# Altium PCB PCB.PcbDoc
Units mil, origin at the board's own origin, x right, y up, seen from the top; angles counter-clockwise.
Board outline 6000 x 4000 mil, 2 copper layers (Top Layer, Bottom Layer); 21 components, 129 nets, 256 pads, 10 vias.
Unrouted connection lines stored in the file: 14.
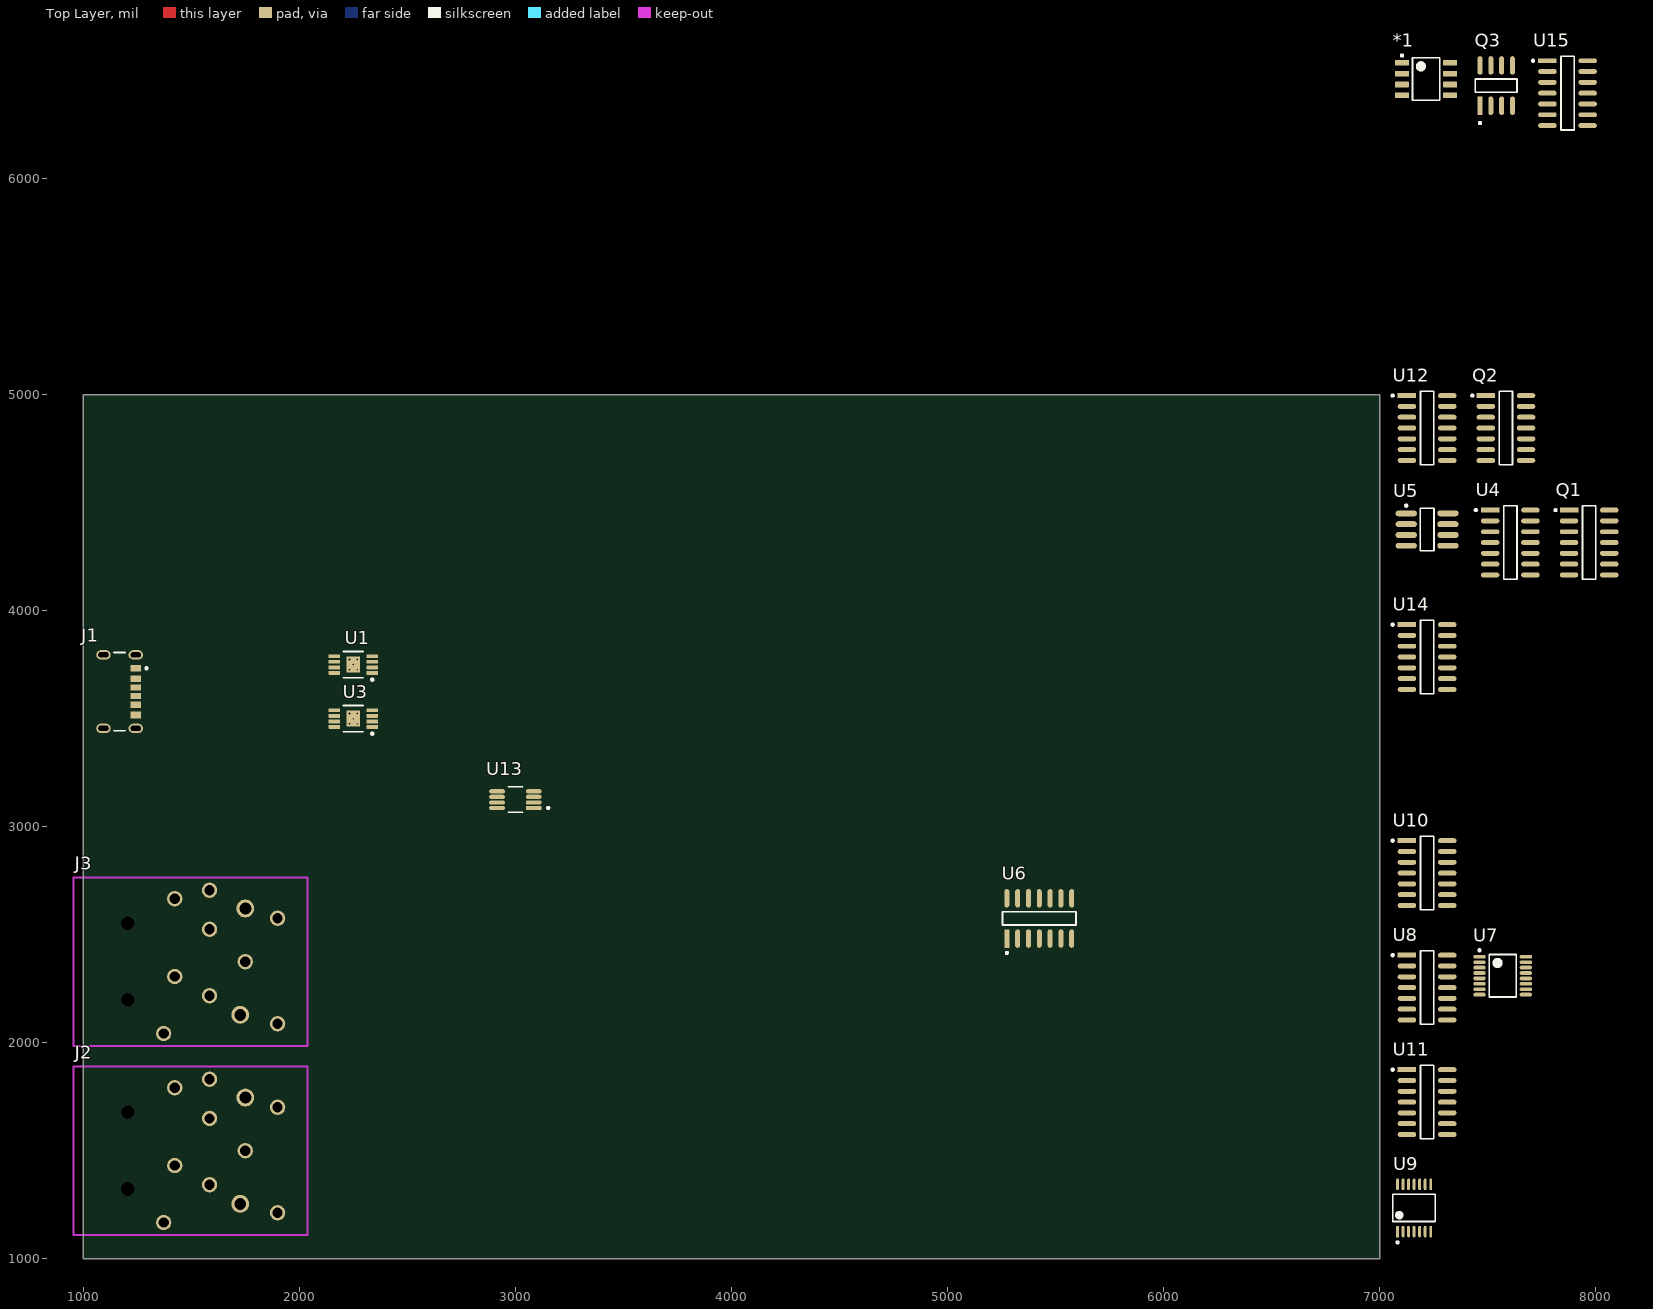
[diagram p0: Top Layer view]
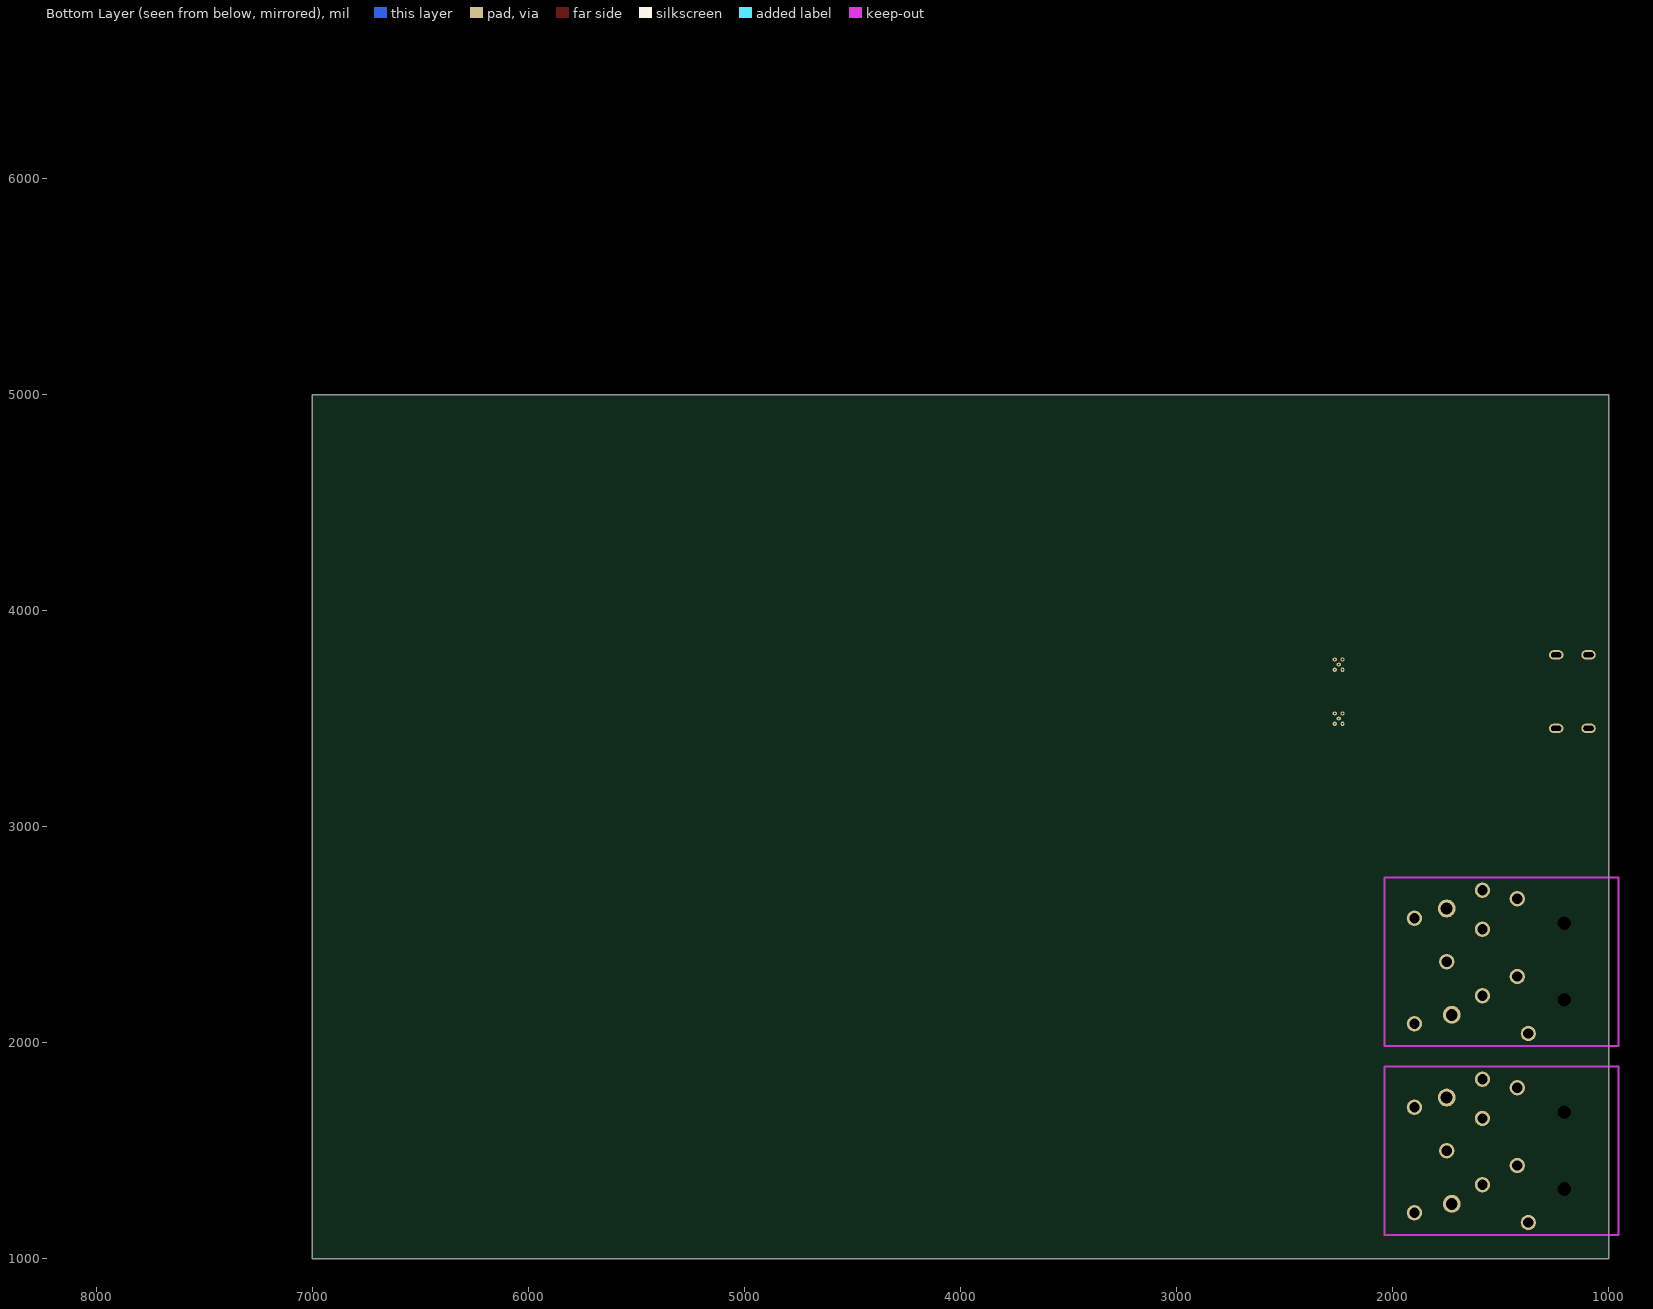
[diagram p1: Bottom Layer view, seen from below]

## Layer stack, top to bottom
Top Solder: solder mask 0.4, Solder Resist, Dk 3.5
Top Layer: signal copper 1.4
Dielectric 1: dielectric 12.6, FR-4, Dk 4.8
Bottom Layer: signal copper 1.4
Bottom Solder: solder mask 0.4, Solder Resist, Dk 3.5

## Board outline
1000,1000 7000,1000 7000,5000 1000,5000

## Design rules (kind name [scope] priority, off if disabled: settings)
Clearance [All] p1: gap=10 ignorepadtopadclearanceinfootprint=FALSE
PolygonConnect [All] p1: connectstyle=Relief reliefconductorwidth=10 reliefentries=4 polygonreliefangle="90 Angle" airgapwidth=10
RoutingVias [All] p1: holewidth=28 width=50 viastyle="Through Hole" minholewidth=28 minwidth=50 maxholewidth=28 maxwidth=50
SolderMaskExpansion [All] p1: expansion=4 istentingtop=FALSE
Width [All] p1: maxlimit=10 minlimit=10 preferedwidth=10
30 further rules are at their usual default settings.

## Classes and differential pairs
component class "tanh function cell": *1 C45 C46 C47 C48 M1 Q3 R84 R85 R86 R87 R88 R89 R90 R91 R92 R93 R94 U15
component class "Precision Full-Bridge Rectifier": D3 D4 R15 R16 R17 R18 R19 R20 R21 R22 R23 R24 R25 R26 R27 R28 U6
component class "Misc. Connections": C35 C36 C37 C38 C39 C40 C41 C42 C43 C44
component class "Log and Anti-Log Converters 2": C24 C25 C26 Q2 R72 R73 R74 R75 R76 R77 R78 R79 U12
component class "Log and Anti-Log Converters 1": C10 C11 C12 C13 Q1 R7 R8 R9 R10 R11 R12 R13 R14 U4 U5
component class "Level Detector": C30 C31 C32 C33 C34 D11 D12 D13 R80 R81 R82 R83 U14 X2 X3
component class "Knee Ratio": C27 C28 C29 U13
component class "Gain Control": C14 C15 R29 R30 R31 R32 R33 R34 R35 U7 U8 X1
component class "Comp Clipper": D9 D10 R57 R58 R59 R60 R61 R62 R63 R64 R65 R66 R67 R68 R69 R70 R71 U11
component class "Balanced Line Connectors": C16 C17 C18 C19 C20 C21 C22 C23 J2 J3 R36 R37 R38 R39 R40 R41 U9

## Components (designator, comment, footprint, x,y, rotation, side; value= is the part's Value field where it differs from the comment)
*1 "REF5050AIDR" D0008A_M 7215,6460 r0 top
J1 "USB-C" FP-USB4125-GF-A-0190-MFG 1125,3625 r270 top
J2 "ACJC10AHBULK" ACJC10AH 954.72,1500 r90 top
J3 "ACJC10AHBULK" ACJC10AH 954.72,2375 r90 top
Q1 "MAT14" FP-R-14-IPC_B 7970,4315 r0 top
Q2 "MAT14" FP-R-14-IPC_B 7585,4845 r0 top
Q3 "SSM2212RZ-R7" FP-R-8-IPC_B 7540,6430 r90 top
U1 "TPS7A4901DGNR" DGN0008D_M 2250,3750 r180 top
U3 "TPS7A3001DGNT" DGN0008D_M 2250,3500 r180 top
U4 "OPA4991IDR" FP-D0014A-IPC_B 7605,4315 r0 top
U5 "ADR01ARZ" ADI-R-8_M 7220,4375 r0 top
U6 "OPA4991" FP-D0014A-IPC_B 5425,2575 r90 top
U7 "THAT4305" QSOP-16 7570,2310 r0 top
U8 "OPA4991" FP-D0014A-IPC_B 7220,2255 r0 top
U9 "INA1650IPWR" FP-PW0014A-IPC_C 7160,1235 r90 top
U10 "OPA4991" FP-D0014A-IPC_B 7220,2785 r0 top
U11 "OPA4991" FP-D0014A-IPC_B 7220,1725 r0 top
U12 "OPA4991IDR" FP-D0014A-IPC_B 7220,4845 r0 top
U13 "OPA1637" FP-DGK0008A-IPC_A 3000,3125 r180 top
U14 "OPA4991" FP-D0014A-IPC_B 7220,3785 r0 top
U15 "OPA4991" FP-D0014A-IPC_B 7870,6395 r0 top

## Footprints (in the part's own frame and the unit in brackets; to place one, negate y for a bottom-side part, rotate by r counter-clockwise, add the part's x,y. Pads: shape width x height; smd on the part's side, far side on the other; paste and mask are expansions set on the pad)
ACJC10AH [mm] "XLR + 1/4 Combo Jack, Horizontal"
  round 2.1 hole 1.4: 1(-6.25,-19.6) 2(6.25,-20.2)
  round 1.8 hole 1.2: 3(0,-20.2) G(-8.45,-10.6) GN(-1.75,-11.9) R(-4,-16) RN(-7.3,-24) S(7.4,-11.9) SN(3.8,-16) T(8.4,-16) TN(5.1,-24)
  round 0 hole 1.6 unplated: MH2(-4.5,-6.4) MH2(4.5,-6.4)
  Keep-Out Layer lines w0.254: -9.9,0 -9.9,-27.5 9.9,-27.5 9.9,0 -9.9,0
ADI-R-8_M [mm] "SOIC, 8-Leads, Body 4.9x3.9mm, Pitch 1.27mm, IPC Low Density"
  oval 2.5x0.7 smd: 1(-2.45,1.905) 2(-2.45,0.635) 3(-2.45,-0.635) 4(-2.45,-1.905) 5(2.45,-1.905) 6(2.45,-0.635) 7(2.45,0.635) 8(2.45,1.905)
  silkscreen extent -2.57,-2.5 0.8,2.93, body extent -2,-2.5 2,2.5, height 1.75
D0008A_M [mm] "SOIC, 8-Leads, Body 5x4mm, Pitch 1.27mm, IPC Low Density"
  rrect15% 1.65x0.65 smd: 1(-2.825,1.905) 2(-2.825,0.635) 3(-2.825,-0.635) 4(-2.825,-1.905) 5(2.825,-1.905) 6(2.825,-0.635) 7(2.825,0.635) 8(2.825,1.905)
  silkscreen extent -2.95,-2.5 1.6,2.9, body extent -3,-2.45 3,2.45, height 1.63
DGN0008D_M [mm] "TSOP, 8-Leads, Body 3.1x3.1mm, Pitch 0.65mm, Thermal Pad 1.89x1.57mm, IPC Medium Density"
  rrect22% 1.35x0.45 smd: 1(-2.225,0.975) 2(-2.225,0.325) 3(-2.225,-0.325) 4(-2.225,-0.975) 5(2.225,-0.975) 6(2.225,-0.325) 7(2.225,0.325) 8(2.225,0.975)
  rrect6% 1.57x1.89 smd: 9(0,0)
  silkscreen extent -2.35,-1.55 1.15,1.9, body extent -2.45,-1.5 2.45,1.5, height 0.94
FP-D0014A-IPC_B [mil]
  rect 85.59x22.92 smd paste+0 mask+0: 1(-93.15,150)
  rrect100% 85.59x22.92 smd paste+0 mask+0: 2(-93.15,100) 3(-93.15,50) 4(-93.15,0) 5(-93.15,-50) 6(-93.15,-100) 7(-93.15,-150) 8(93.15,-150) 9(93.15,-100) 10(93.15,-50) 11(93.15,0) 12(93.15,50) 13(93.15,100) 14(93.15,150)
  silkscreen extent -164,-170 31,170, body extent -146,-180 146,180, height 10
FP-DGK0008A-IPC_A [mm]
  rect 1.857x0.498 smd paste+0 mask+0: 1(-2.151,0.975)
  rrect100% 1.857x0.498 smd paste+0 mask+0: 2(-2.151,0.325) 3(-2.151,-0.325) 4(-2.151,-0.975) 5(2.151,-0.975) 6(2.151,-0.325) 7(2.151,0.325) 8(2.151,0.975)
  silkscreen extent -3.98,-1.5 0.85,1.5, body extent -3.58,-2 3.58,2, height 0.25
FP-PW0014A-IPC_C [mm]
  rect 1.355x0.341 smd paste+0 mask+0: 1(-2.775,1.95)
  rrect100% 1.355x0.341 smd paste+0 mask+0: 2(-2.775,1.3) 3(-2.775,0.65) 4(-2.775,0) 5(-2.775,-0.65) 6(-2.775,-1.3) 7(-2.775,-1.95) 8(2.775,-1.95) 9(2.775,-1.3) 10(2.775,-0.65) 11(2.775,0) 12(2.775,0.65) 13(2.775,1.3) 14(2.775,1.95)
  silkscreen extent -4.17,-2.5 1.6,2.5, body extent -3.55,-2.6 3.55,2.6, height 0.25
FP-R-8-IPC_B [mil]
  rect 85.59x22.92 smd paste+0 mask+0: 1(-93.15,75)
  rrect100% 85.59x22.92 smd paste+0 mask+0: 2(-93.15,25) 3(-93.15,-25) 4(-93.15,-75) 5(93.15,-75) 6(93.15,-25) 7(93.15,25) 8(93.15,75)
  silkscreen extent -178,-96 31,96, body extent -146,-106 146,106, height 10
FP-R-14-IPC_B [mil]
  rect 85.59x22.92 smd paste+0 mask+0: 1(-93.15,150)
  rrect100% 85.59x22.92 smd paste+0 mask+0: 2(-93.15,100) 3(-93.15,50) 4(-93.15,0) 5(-93.15,-50) 6(-93.15,-100) 7(-93.15,-150) 8(93.15,-150) 9(93.15,-100) 10(93.15,-50) 11(93.15,0) 12(93.15,50) 13(93.15,100) 14(93.15,150)
  silkscreen extent -161,-170 31,170, body extent -146,-180 146,180, height 10
FP-USB4125-GF-A-0190-MFG [mm]
  rrect100% 1.1x1.7 hole 1.2 slot 0.6 at 0 deg paste-2539.97 mask+0: 1(-4.32,3) 2(4.32,3) 3(-4.32,-0.8) 4(4.32,-0.8)
  rect 0.7x1.2 smd paste+0 mask+0: A5(-0.5,3) B5(0.5,3)
  rect 0.76x1.2 smd paste+0 mask+0: A9(1.52,3) B9(-1.52,3)
  rect 0.8x1.2 smd paste+0 mask+0: A12(2.75,3) B12(-2.75,3)
  silkscreen extent -4.59,0.43 4.59,4.38, body extent -4.97,-3.57 4.97,3.95, height 0.25
QSOP-16 [mm] "QSOP, 16-Leads, Body 4.89x3.90mm, Pitch 0.64mm, IPC Medium Density"
  oval 1.45x0.45 smd: 1(-2.725,2.222) 2(-2.725,1.587) 3(-2.725,0.953) 4(-2.725,0.318) 5(-2.725,-0.318) 6(-2.725,-0.953) 7(-2.725,-1.587) 8(-2.725,-2.222) 9(2.725,-2.222) 10(2.725,-1.587) 11(2.725,-0.953) 12(2.725,-0.318) 13(2.725,0.318) 14(2.725,0.953) 15(2.725,1.587) 16(2.725,2.222)
  silkscreen extent -2.85,-2.5 1.6,3.12, body extent -3,-2.5 3,2.5, height 1.75

## Part data
*1: "Three Terminal Voltage Reference, 1 Output, 5V, Trim/Adjustable, PDSO8", Case/Package=SOP, Manufacturer="Texas Instruments", Max Operating Temperature=125°C, Max Output Voltage=5.005V, Max Supply Voltage=18V, Min Operating Temperature=-40°C, Min Output Voltage=4.995V, Min Supply Voltage=2.7V, Nominal Output Voltage=5V, Package Body Material=Plastic, Package Equivalence Code=SOP8,.25, Package Shape=Rectangular, Package Style="SMALL OUTLINEMeter", Peak Reflow Temperature (Cel)=260°C, Supplier Part Number=595-REF5050AIDR, Temp Coef of Voltage-Max=3ppm/°C, Temperature Grade=AUTOMOTIVE, Voltage Tolerance-Max=0.1%, Category="Voltage References", Channels=1, ComponentLink1Description=https://www.ti.com:443/lit/ds/symlink/ref5010.pdf?src-supplier=IHS+Markit, ComponentLink1URL=https://www.ti.com:443/lit/ds/symlink/ref5010.pdf?src-supplier=IHS+Markit, ComponentLink2Description=https://datasheet.ciiva.com/3236/ref5050-3236312.pdf?src-supplier=Avnet, ComponentLink2URL=https://datasheet.ciiva.com/3236/ref5050-3236312.pdf?src-supplier=Avnet, ComponentLink3Description=https://datasheet.ciiva.com/2012/ref5020-2012761.pdf?src-supplier=Digikey, ComponentLink3URL=https://datasheet.ciiva.com/2012/ref5020-2012761.pdf?src-supplier=Digikey, Height - Seated (Max)=1.75mm, JESD-30 Code=R-PDSO-G8, JESD-609 Code=e4, Length=4.9mm, Manufacturer Part Number=REF5050AIDR, Moisture Sensitivity Level=2, Number of Outputs=1, Pins=8, Pricing="1=3.52, 10=3.17, 50=3.17, 100=2.59, 250=2.46, 500=2.21, 1000=1.86, 2500=1.77, 5000=1.7, 10000=1.77 (USD)", Qualification Status="Not Qualified", Reach SVHC Compliant=Yes, RoHS=Yes, RoHS Compliant=Yes, Stock=15005, Supplier=Mouser, Surface Mount=Yes, Terminal Finish=Nickel, Terminal Form="Gull Wing", Terminal Pitch=1.27mm, Terminal Position=DUAL, Throw Configuration="THREE TERMINAL VOLTAGE REFERENCE", Trim/Adjustable Output=Yes, Width=3.9mm
J1: "Generic USB-C Connector, Female"
J2 J3: "Audio/RCA Connector, 10 Pole(s), Female, Solder Terminal, Latch, Receptacle", Manufacturer=Amphenol, Supplier Part Number=889-ACJC10AHBULK-ND, ComponentLink1Description=https://datasheet.ciiva.com:443/pdfs/VipMasterIC/IC/AMPH/AMPHS14349/AMPHS14349-1.pdf?src-supplier=IHS+Markit, ComponentLink1URL=https://datasheet.ciiva.com:443/pdfs/VipMasterIC/IC/AMPH/AMPHS14349/AMPHS14349-1.pdf?src-supplier=IHS+Markit, ComponentLink2Description=https://datasheet.ciiva.com/15309/88010807000-acjc10ah-241575-15309467.pdf?src-supplier=Mouser, ComponentLink2URL=https://datasheet.ciiva.com/15309/88010807000-acjc10ah-241575-15309467.pdf?src-supplier=Mouser, Connector Type="AUDIO/RCA CONNECTOR", Contact Finish - Mating="NOT SPECIFIED", Manufacturer Part Number=ACJC10AHBULK, Pricing="1=3.96, 10=3.6, 25=3.4092, 50=3.33, 100=3.1714, 250=2.77496, 500=2.69568, 1000=2.29926, 2500=2.1407 (USD)", RoHS=Yes, RoHS Compliant=Yes, Stock=1003, Supplier=Digikey
Q1 Q2: library part MAT14ARZ, "TRANS 4NPN 40V 0.03A 14SO", Case/Package=SOIC, Collector Base Voltage (VCBO)=40V, Collector Emitter Saturation Voltage=60mV, Frequency=300MHz, Max Collector Current=30mA, Max Frequency=1kHz, Max Operating Temperature=85°C, Min Operating Temperature=-40°C, Package Quantity=56, Collector Emitter Breakdown Voltage=40V, Collector Emitter Voltage (VCEO)=40V, Collector-emitter Voltage-Max=60mV, Height=1.5mm, Lead Free="Contains Lead", Length=8.75mm, Mount="Surface Mount", Number of Elements=4, Number of Pins=14, Packaging=Rail/Tube, Polarity=NPN, Radiation Hardening=No, REACH SVHC="No SVHC", RoHS Compliant=Yes, Series=MAT14, Transition Frequency=300MHz, Width=4mm
Q3: library part SSM2212, "TRANS 2NPN 40V 0.02A 8SOIC", Case/Package=SOIC, Collector Base Voltage (VCBO)=40V, Collector Emitter Breakdown Voltage=45V, Collector-emitter Voltage-Max=800mV, Frequency=200MHz, Max Collector Current=20mA, Max Operating Temperature=85°C, Max Power Dissipation=500mW, Min Operating Temperature=-40°C, Package Quantity=1000, Transition Frequency=450MHz, Collector Emitter Voltage (VCEO)=40V, Contact Plating=Tin, Element Configuration=Dual, Lead Free="Contains Lead", Max Breakdown Voltage=40V, Mount="Surface Mount", Number of Elements=2, Number of Pins=8, Packaging="Tape and Reel", Polarity=NPN, Radiation Hardening=No, RoHS Compliant=Yes, Series=SSM2212
U1: "Adjustable Positive LDO Regulator, 1.176V Min, 33V Max, 0.6V Dropout, BIPolar, PDSO8", Case/Package=HTSSOP, Dropout Voltage1-Max=600mV, Dropout Voltage1-Nom=333mV, Manufacturer="Texas Instruments", Operating Temperature, TJ-Max=125°C, Operating Temperature, TJ-Min=-40°C, Output Current1-Max=150mA, Output Voltage1-Max=33V, Output Voltage1-Min=1.194V, Package Body Material=Plastic, Package Equivalence Code=TSSOP8,.19, Package Shape=Square, Package Style="SMALL OUTLINE, HEAT SINK/SLUG, THIN PROFILE, SHRINK PITCHMeter", Peak Reflow Temperature (Cel)=260°C, Supplier Part Number=595-TPS7A4901DGNR, Adjustability=ADJUSTABLE, Category="Voltage Regulators - Linear", Channels=1, ComponentLink1Description=https://www.ti.com:443/lit/ds/symlink/tps7a49.pdf?src-supplier=IHS+Markit, ComponentLink1URL=https://www.ti.com:443/lit/ds/symlink/tps7a49.pdf?src-supplier=IHS+Markit, ComponentLink2Description=https://datasheet.ciiva.com/4885/sbvs121b-126024-4885345.pdf?src-supplier=Mouser, ComponentLink2URL=https://datasheet.ciiva.com/4885/sbvs121b-126024-4885345.pdf?src-supplier=Mouser, ComponentLink3Description=https://datasheet.ciiva.com/41462/001015155-da-01-en-ic-reg-ldo-adj-tps7a4901dgnr-vssop-8-tid-41462999.pdf?src-supplier=Conrad, ComponentLink3URL=https://datasheet.ciiva.com/41462/001015155-da-01-en-ic-reg-ldo-adj-tps7a4901dgnr-vssop-8-tid-41462999.pdf?src-supplier=Conrad, ComponentLink4Description=https://datasheet.ciiva.com/7547/1857485-7547109.pdf?src-supplier=Newark, ComponentLink4URL=https://datasheet.ciiva.com/7547/1857485-7547109.pdf?src-supplier=Newark, ComponentLink5Description=https://datasheet.ciiva.com/14275/sbvs121b-14275869.pdf?src-supplier=Avnet, ComponentLink5URL=https://datasheet.ciiva.com/14275/sbvs121b-14275869.pdf?src-supplier=Avnet, Height - Seated (Max)=1.1mm, JESD-30 Code=S-PDSO-G8, JESD-609 Code=e4, Length=3mm, Manufacturer Part Number=TPS7A4901DGNR, Moisture Sensitivity Level=2, Number of Outputs=1, Packaging="Tape and Reel", Pins=8, Pricing="1=2.84, 10=2.56, 50=2.56, 100=2.09, 1000=1.5, 10000=1.37 (USD)", Qualification Status="Not Qualified", Reach SVHC Compliant=Yes, Regulator Type="ADJUSTABLE POSITIVE SINGLE OUTPUT LDO REGULATOR", RoHS=Yes, RoHS Compliant=Yes, Stock=5747, Supplier=Mouser, Surface Mount=Yes, Technology=BIPOLAR, Terminal Finish=Nickel, Terminal Form="Gull Wing", Terminal Pitch=0.65mm, Terminal Position=DUAL, Width=3mm
U3: "Adjustable Negative LDO Regulator, 1.18V Min, 33V Max, 0.6V Dropout, BIPolar, PDSO8", Case/Package=HTSSOP, Dropout Voltage1-Max=600mV, Dropout Voltage1-Nom=325mV, Manufacturer="Texas Instruments", Operating Temperature, TJ-Max=125°C, Operating Temperature, TJ-Min=-40°C, Output Current1-Max=200mA, Output Voltage1-Max=33V, Output Voltage1-Min=1.18V, Package Body Material=Plastic, Package Equivalence Code=TSSOP8,.19, Package Shape=Square, Package Style="SMALL OUTLINE, HEAT SINK/SLUG, THIN PROFILE, SHRINK PITCHMeter", Peak Reflow Temperature (Cel)=260°C, Supplier Part Number=595-TPS7A3001DGNT, Adjustability=ADJUSTABLE, Category="Voltage Regulators - Linear", Channels=1, ComponentLink1Description=https://www.ti.com:443/lit/ds/symlink/tps7a30.pdf?src-supplier=IHS+Markit, ComponentLink1URL=https://www.ti.com:443/lit/ds/symlink/tps7a30.pdf?src-supplier=IHS+Markit, ComponentLink2Description=https://datasheet.ciiva.com/22733/1726442-22733400.pdf?src-supplier=Farnell, ComponentLink2URL=https://datasheet.ciiva.com/22733/1726442-22733400.pdf?src-supplier=Farnell, ComponentLink3Description=https://datasheet.ciiva.com/4885/sbvs125a-126025-4885255.pdf?src-supplier=Mouser, ComponentLink3URL=https://datasheet.ciiva.com/4885/sbvs125a-126025-4885255.pdf?src-supplier=Mouser, ComponentLink4Description=https://datasheet.ciiva.com/14276/tps7a3001-14276192.pdf?src-supplier=Avnet, ComponentLink4URL=https://datasheet.ciiva.com/14276/tps7a3001-14276192.pdf?src-supplier=Avnet, Height - Seated (Max)=1.1mm, JESD-30 Code=S-PDSO-G8, JESD-609 Code=e4, Length=3mm, Manufacturer Part Number=TPS7A3001DGNT, Moisture Sensitivity Level=2, Number of Outputs=1, Packaging="Tape and Reel", Pins=8, Pricing="1=4.76, 10=4.19, 50=4.19, 100=3.5, 250=3.32, 500=2.98, 1000=2.52, 2500=2.39, 10000=2.39 (USD)", Qualification Status="Not Qualified", Reach SVHC Compliant=Yes, Regulator Type="ADJUSTABLE NEGATIVE SINGLE OUTPUT LDO REGULATOR", RoHS=Yes, RoHS Compliant=Yes, Stock=15878, Supplier=Mouser, Surface Mount=Yes, Technology=BIPOLAR, Terminal Finish=Nickel, Terminal Form="Gull Wing", Terminal Pitch=0.65mm, Terminal Position=DUAL, Width=3mm
U4 U12: "40-V, DUAL 4.5MHZ, RAIL-TO-RAIL"
U5: library part CMP-0784-00317-1, "Ultracompact, Precision Voltage Reference, 10 V Output, 12 to 36 V Supply, Industrial, 8-pin SOIC (R-8), Tube", Manufacturer="Analog Devices", Operating Temp Range="-40 to 125 degC", Code_JEDEC=MS-012-AA, ComponentLink1Description="Manufacturer URL", ComponentLink1URL=http://www.analog.com/en/index.html, ComponentLink2Description=Datasheet, ComponentLink2URL=http://www.analog.com/static/imported-files/data_sheets/ADR01_02_03_06.pdf, ComponentLink3Description="Package Specification", ComponentLink3URL=http://www.analog.com/static/imported-files/packages/PKG_PDF/SOIC_Narrow%20(R)/R_8.pdf, ComponentLink4Description="URL Link1", ComponentLink4URL="Product URL:http://www.analog.com/en/special-linear-functions/voltage-references/adr01/products/product.html", DatasheetVersion="Rev. R", Max V Supply (V)=36, Min V Supply (V)=12, Mounting Technology="Surface Mount", PackageDescription="8-Pin Standard Small Outline Package, Body 4.9 x 3.9 mm, Pitch 1.27 mm", PackageReference=R-8, PackageVersion="060506-A, 06/2006", Packing=Tube, PartNumber=ADR01ARZ, Ref Out TC (ppm/C)=3, Vout=10V
U6 U8 U10 U11 U14 U15: library part OPA4991IDR, "40-V, DUAL 4.5MHZ, RAIL-TO-RAIL"
U7: library part 4305Q16-U, "Pre-trimmed Analog Engine® Dynamics Processor IC"
U9: "IC AUDIO RECEIVER 14TSSOP", Case/Package=TSSOP, Max Operating Temperature=125°C, Min Operating Temperature=-40°C, Logic Function=Receiver, Number of Channels=2, Number of Pins=14, Packaging="Tape and Reel", RoHS Compliant=Yes
U13: library part OPA1637DGKT, "Fully differential amplifier"

## Via types
v1: diameter 19.68, hole 7.87, Top Layer to Bottom Layer, 10 vias

## Nets (pads, with @x,y where several pads share a name; then routed paths per layer and width w, separated by ;. In a path a pad name is that pad's centre, name@x,y a point inside that pad or via, vN(x,y) a via of type N, cw(c..) or ccw(c..) an arc to the next point about the centre after c; other vN are vias at no path point)
5V: J1.1
+10V_Ref: 
+15V: U9.1 U13.3
-15V: U9.14 U13.6
Net*1_6: 
NetC1_1: 
NetC3_2: 
NetC5_2: 
NetC6_1: 
NetC7_1: 
NetC9_2: 
NetC10_1: 
NetC11_1: 
NetC11_2: 
NetC13_1: 
NetC18_1: U9.2
NetC18_2: J2.2 J2.T
NetC19_1: U9.4
NetC19_2: J2.3 J2.R
NetC20_1: U9.7
NetC20_2: J3.2 J3.T
NetC21_1: J3.3 J3.R U9.5
NetC24_1: 
NetC25_1: 
NetC25_2: 
NetC26_1: 
NetC28_2: U13.2
NetC30_2: 
NetC31_1: 
NetC31_2: 
NetC32_1: 
NetC32_2: 
NetC33_2: 
NetC45_1: 
NetC45_2: 
NetC46_2: 
NetD1_1: 
NetD2_2: 
NetD3_1: 
NetD3_2: 
NetD4_1: 
NetD5_1: 
NetD5_2: 
NetD6_1: 
NetD7_1: 
NetD7_2: 
NetD8_1: 
NetD9_1: 
NetD9_2: 
NetD10_1: 
NetD11_1: 
NetD11_2: 
NetD12_2: 
NetJ1_2: J1.2
NetJ1_3: J1.3
NetJ1_4: J1.4
NetM1_1: 
NetM1_2: 
NetM1_3: 
NetQ1_3: 
NetQ1_6: Q1.6
NetQ1_9: 
NetQ1_10: 
NetQ1_14: 
NetQ2_3: 
NetQ2_6: Q2.6
NetQ2_9: 
NetQ2_10: 
NetQ2_14: 
NetQ3_1: 
NetQ3_2: 
NetQ3_8: 
NetR8_2: 
NetR11_2: 
NetR13_2: 
NetR15_1: 
NetR15_2: 
NetR17_2: 
NetR20_1: 
NetR20_2: 
NetR21_2: 
NetR22_1: 
NetR22_2: 
NetR23_1: 
NetR23_2: 
NetR24_1: 
NetR25_1: 
NetR29_1: 
NetR29_2: 
NetR30_1: 
NetR30_2: 
NetR32_2: 
NetR33_2: 
NetR34_1: 
NetR38_1: U9.3
NetR39_1: U9.6
NetR42_2: 
NetR44_2: 
NetR48_2: 
NetR50_1: 
NetR50_2: 
NetR55_1: 
NetR57_1: 
NetR57_2: 
NetR64_1: 
NetR64_2: 
NetR65_2: 
NetR67_2: 
NetR68_1: 
NetR68_2: 
NetR69_1: 
NetR70_1: 
NetR76_2: 
NetR80_1: 
NetR82_2: 
NetR83_2: 
NetR89_2: 
NetR90_2: 
NetR92_1: 
NetT1_1: 
NetT1_3: 
NetU7_5: 
NetU9_8: U9.8
NetU9_13: U9.13
NetU13_1: U13.1
NetU14_8: 
NetU14_12: 
PGND: 
SGND: J2.1 J2.G J2.S J3.1 J3.G J3.S U9.9 U9.12
pads on no net: *1.1 *1.2 *1.3 *1.4 *1.5 *1.6 *1.7 *1.8 J1.A5 J1.A9 J1.A12 J1.B5 J1.B9 J1.B12 J2.GN J2.MH2 J2.RN J2.SN J2.TN J3.GN J3.MH2 J3.RN J3.SN J3.TN Q1.1 Q1.2 Q1.3 Q1.4 Q1.5 Q1.7 Q1.8 Q1.9 Q1.10 Q1.11 Q1.12 Q1.13 Q1.14 Q2.1 Q2.2 Q2.3 Q2.4 Q2.5 Q2.7 Q2.8 Q2.9 Q2.10 Q2.11 Q2.12 Q2.13 Q2.14 Q3.1 Q3.2 Q3.3 Q3.4 Q3.5 Q3.6 Q3.7 Q3.8 U1.1 U1.2 U1.3 U1.4 U1.5 U1.6 U1.7 U1.8 U1.9 U3.1 U3.2 U3.3 U3.4 U3.5 U3.6 U3.7 U3.8 U3.9 U4.1 U4.2 U4.3 U4.4 U4.5 U4.6 U4.7 U4.8 U4.9 U4.10 U4.11 U4.12 U4.13 U4.14 U5.1 U5.2 U5.3 U5.4 U5.5 U5.6 U5.7 U5.8 U6.1 U6.2 U6.3 U6.4 U6.5 U6.6 U6.7 U6.8 U6.9 U6.10 U6.11 U6.12 U6.13 U6.14 U7.1 U7.2 U7.3 U7.4 U7.5 U7.6 U7.7 U7.8 U7.9 U7.10 U7.11 U7.12 U7.13 U7.14 U7.15 U7.16 U8.1 U8.2 U8.3 U8.4 U8.5 U8.6 U8.7 U8.8 U8.9 U8.10 U8.11 U8.12 U8.13 U8.14 U9.10 U9.11 U10.1 U10.2 U10.3 U10.4 U10.5 U10.6 U10.7 U10.8 U10.9 U10.10 U10.11 U10.12 U10.13 U10.14 U11.1 U11.2 U11.3 U11.4 U11.5 U11.6 U11.7 U11.8 U11.9 U11.10 U11.11 U11.12 U11.13 U11.14 U12.1 U12.2 U12.3 U12.4 U12.5 U12.6 U12.7 U12.8 U12.9 U12.10 U12.11 U12.12 U12.13 U12.14 U13.4 U13.5 U13.7 U13.8 U14.1 U14.2 U14.3 U14.4 U14.5 U14.6 U14.7 U14.8 U14.9 U14.10 U14.11 U14.12 U14.13 U14.14 U15.1 U15.2 U15.3 U15.4 U15.5 U15.6 U15.7 U15.8 U15.9 U15.10 U15.11 U15.12 U15.13 U15.14
copper on no net:
  other v1: 2232.28,3476.38 2267.72,3476.38 2250,3500 2232.28,3523.62 2267.72,3523.62 2232.28,3726.38 2267.72,3726.38 2250,3750 2232.28,3773.62 2267.72,3773.62